# Altium PCB PCB1.PcbDoc (part 2 of 2)
Units mil, origin at the board's own origin, x right, y up, seen from the top; angles counter-clockwise.
Board outline 3975 x 3295 mil, 2 copper layers (Top Layer, Bottom Layer); 85 components, 105 nets, 658 pads, 194 vias.
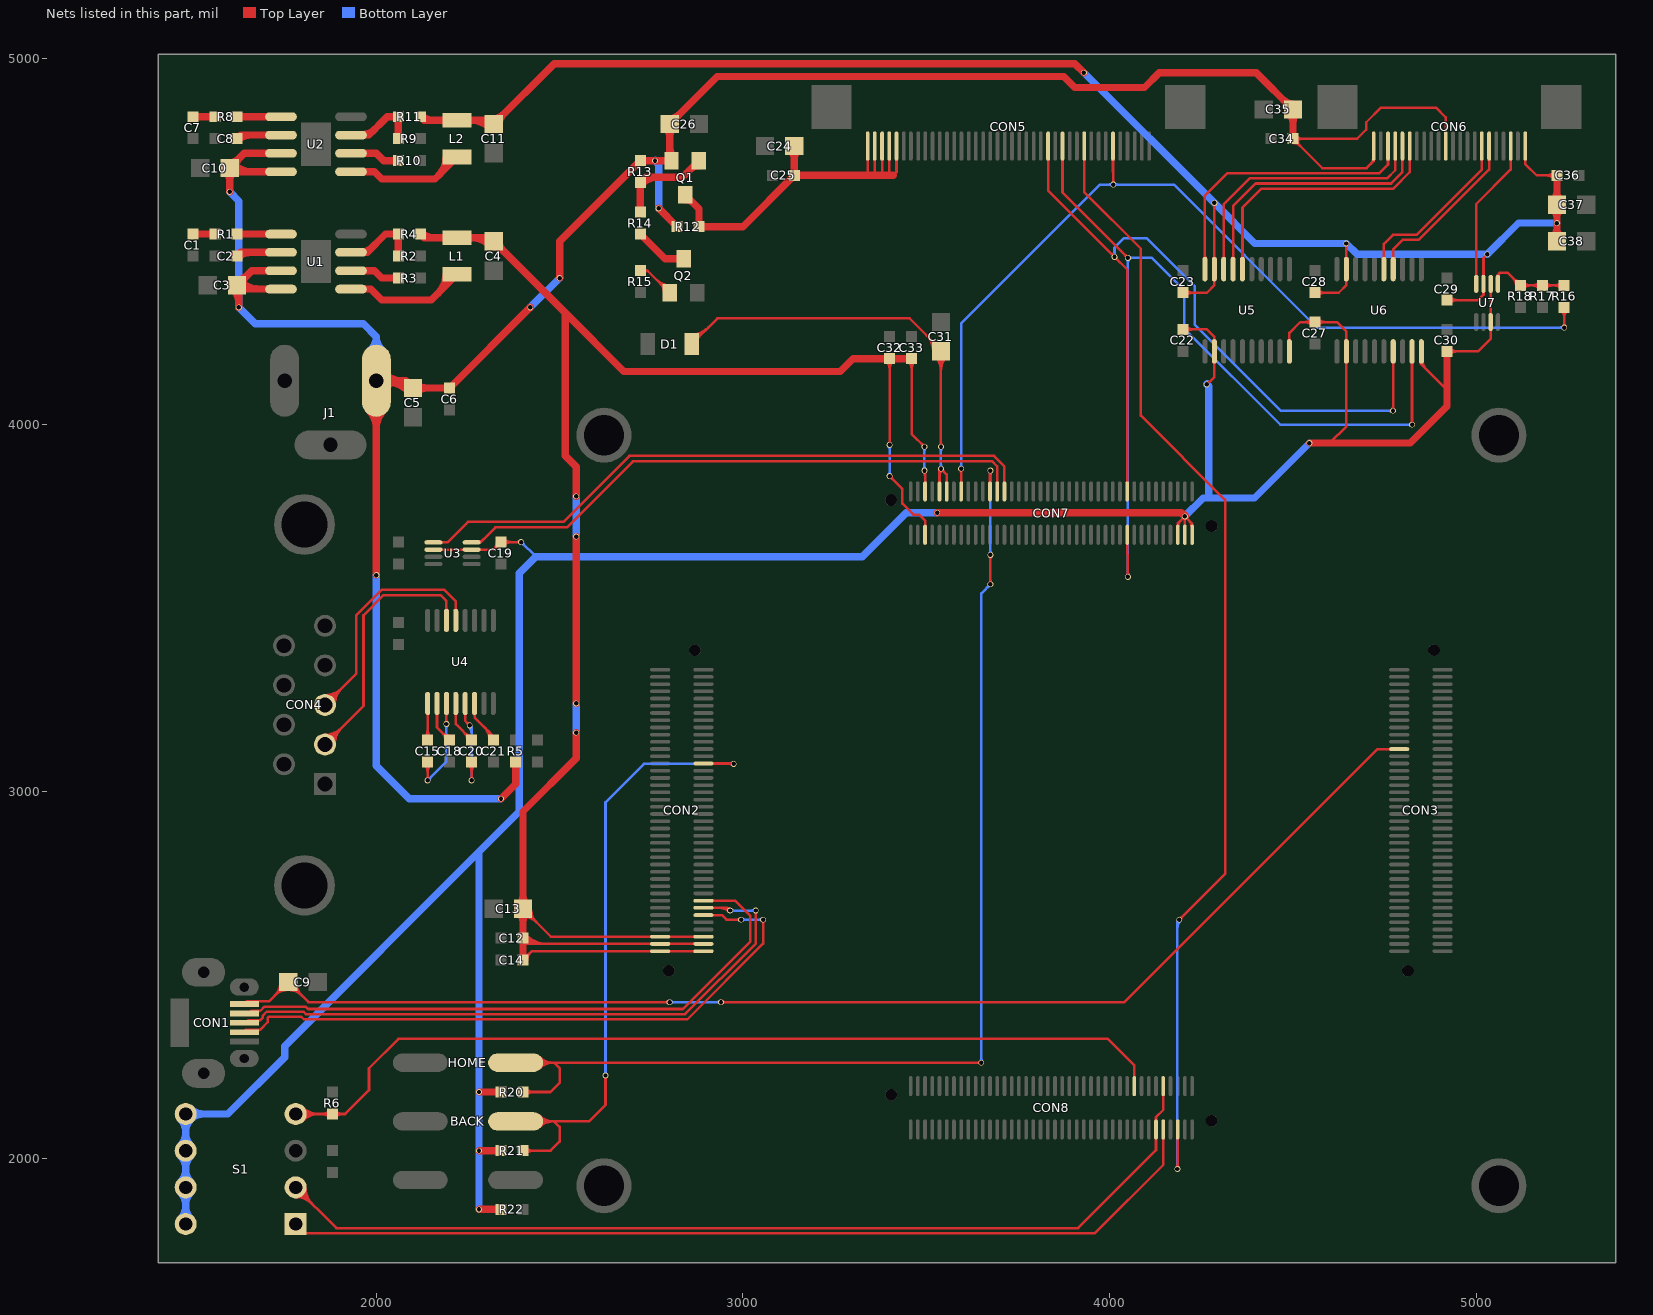
[diagram p2: the nets of this part, all layers, seen from the top]

## Via types
v1: diameter 16, hole 12, Top Layer to Bottom Layer, 194 vias

## Nets (pads, with @x,y where several pads share a name; then routed paths per layer and width w, separated by ;. In a path a pad name is that pad's centre, name@x,y a point inside that pad or via, vN(x,y) a via of type N, cw(c..) or ccw(c..) an arc to the next point about the centre after c; other vN are vias at no path point) (continued)
LCD_VOTCLK: CON5.28 CON7.19 U6.9 | length 2721.9
  Top Layer w7: CON5.28@3871.5,4760 3871.5,4633.5 v1(4050,4455) ; v1@4045.5,4455 ccw(c4034.64,4455) 4042.32,4462.68 ccw(c4050,4470.36) v1@4050,4459.5 ; v1@4046.82,3588.18 ccw(c4039.14,3595.86) 4050,3595.86 ccw(c4060.86,3595.86) v1@4053.18,3588.18 ; CON7.19@4047.83,3700 4047.83,3647.17 4050,3645 v1(4050,3585) ; v1@4821.82,4003.18 ccw(c4814.8,4010.2) 4824.72,4010.2 ; U6.9@4822.33,4171.03 cw(c4816.54,4165.24) 4824.72,4165.24 cw(c4832.91,4165.24) U6.9@4827.12,4171.03 ; 4824.72,4011.53 ccw(c4836.53,4011.53) v1@4828.18,4003.18 ; U6.9@4824.72,4200 4824.72,4000.28 v1(4825,4000)
  Bottom Layer w7: v1@4046.82,3588.18 ccw(c4039.14,3595.86) 4050,3595.86 ccw(c4060.86,3595.86) v1@4053.18,3588.18 ; v1@4046.82,4451.82 cw(c4039.14,4444.14) 4050,4444.14 cw(c4060.86,4444.14) 4053.18,4451.82 cw(c4060.86,4444.14) 4060.86,4455 cw(c4060.86,4465.86) v1@4053.18,4458.18 ; v1(4050,3585) v1(4050,4455) 4115,4455 4204,4366 4204,4261.6 4465.6,4000 v1(4825,4000) ; v1@4821.82,3996.82 ccw(c4814.14,3989.14) 4814.14,4000 ccw(c4814.14,4010.86) v1@4821.82,4003.18
LCD_VSYNC: CON5.26 CON7.20 U6.7 | length 2349.1
  Top Layer w7: CON5.26@3832.13,4760 3832.13,4639.04 v1(4013.27,4457.89) 4048.5,4422.66 4048.5,3818.79 CON7.20@4047.83,3818.12 ; v1@4008.77,4457.89 ccw(c3997.91,4457.89) 4005.59,4465.57 ccw(c4013.27,4473.26) v1@4013.27,4462.39 ; v1@4013.27,4453.39 cw(c4013.27,4442.53) 4020.95,4450.21 cw(c4028.63,4457.89) v1@4017.77,4457.89 ; CON7.20@4046.77,3841.68 ccw(c4042.59,3845.85) 4048.5,3845.85 ; v1@4769.82,4041.18 ccw(c4760.82,4050.18) 4773.54,4050.18 ; U6.7@4771.15,4171.03 cw(c4765.36,4165.24) 4773.54,4165.24 cw(c4781.73,4165.24) U6.7@4775.94,4171.03 ; v1(4773,4038) 4773.54,4038.54 U6.7@4773.54,4200 ; 4773.54,4047.55 ccw(c4782.55,4047.55) v1@4776.18,4041.18
  Bottom Layer w7: v1@4010.09,4461.07 ccw(c4002.41,4468.76) 4013.27,4468.76 ccw(c4024.13,4468.76) v1@4016.45,4461.07 ; v1(4013.27,4457.89) 4013.27,4483.27 4039,4509 4101,4509 4232,4378 4232,4273.2 4467.2,4038 v1(4773,4038) ; v1@4769.82,4034.82 ccw(c4762.14,4027.14) 4762.14,4038 ccw(c4762.14,4048.86) v1@4769.82,4041.18
MD_RSTN: CON5.35 CON7.66 R16.1 | length 2744.5
  Top Layer w7: v1@3591.82,3876.82 cw(c3584.14,3869.14) 3595,3869.14 cw(c3605.86,3869.14) v1@3598.18,3876.82 ; CON7.66@3595,3818.2 v1(3595,3880) ; v1@4006.82,4658.18 ccw(c3999.14,4665.86) 4010,4665.86 ccw(c4020.86,4665.86) v1@4013.18,4658.18 ; CON5.35@4009.29,4760 4009.29,4690 4010,4689.29 v1(4010,4655) ; R16.1@5231.87,4311.87 cw(c5212.24,4292.24) 5240,4292.24 cw(c5267.76,4292.24) R16.1@5248.13,4311.87 ; v1@5236.82,4268.18 ccw(c5229.14,4275.86) 5240,4275.86 ccw(c5250.86,4275.86) v1@5243.18,4268.18 ; v1(5240,4265) R16.1@5240,4320
  Bottom Layer w7: v1@3591.82,3883.18 ccw(c3584.14,3890.86) 3595,3890.86 ccw(c3605.86,3890.86) v1@3598.18,3883.18 ; v1(3595,3880) 3595,4275.71 3974.29,4655 v1(4010,4655) 4175,4655 4565,4265 v1(5240,4265) ; v1@4006.82,4651.82 ccw(c3999.14,4644.14) 3999.14,4655 ccw(c3999.14,4665.86) v1@4006.82,4658.18 ; v1@4013.18,4651.82 cw(c4020.86,4644.14) 4020.86,4655 cw(c4020.86,4665.86) v1@4013.18,4658.18 ; v1@5236.82,4261.82 ccw(c5229.14,4254.14) 5229.14,4265 ccw(c5229.14,4275.86) v1@5236.82,4268.18
NetC1_1: C1.1 R1.1 | length 60
  Top Layer w20: C1.1@1500,4520 R1.1@1560,4520
NetC2_1: C2.1 U1.2 | length 160.4
  Top Layer w20: C2.1@1620,4460 1630,4470 U1.2@1740,4470 ; C2.1@1623.54,4456.46 cw(c1656.21,4423.79) 1656.21,4470
NetC7_1: C7.1 R8.1 | length 60
  Top Layer w20: C7.1@1500,4840 R8.1@1560,4840
NetC8_1: C8.1 U2.2 | length 160.4
  Top Layer w20: C8.1@1620,4780 1630,4790 U2.2@1740,4790 ; C8.1@1623.54,4776.46 cw(c1656.21,4743.79) 1656.21,4790
NetC15_1: C15.1 U4.3 | length 405.9
  Top Layer w7: C15.1@2131.87,3071.87 cw(c2112.24,3052.24) 2140,3052.24 cw(c2167.76,3052.24) C15.1@2148.13,3071.87 ; v1@2136.82,3033.18 ccw(c2129.14,3040.86) 2140,3040.86 ccw(c2150.86,3040.86) v1@2143.18,3033.18 ; v1(2140,3030) C15.1@2140,3080 ; v1@2188,3187 ccw(c2180.32,3194.68) 2191.18,3194.68 ccw(c2202.05,3194.68) v1@2194.36,3187 ; U4.3@2188.78,3213 cw(c2183,3207.21) 2191.18,3207.21 cw(c2199.36,3207.21) U4.3@2193.58,3213 ; v1(2191.18,3183.82) U4.3@2191.18,3240
  Bottom Layer w7: v1(2140,3030) 2191.18,3081.18 v1(2191.18,3183.82) ; v1@2140,3034.5 ccw(c2140,3045.36) 2147.68,3037.68 ccw(c2155.36,3030) v1@2144.5,3030 ; v1@2188,3180.64 cw(c2180.32,3172.95) 2191.18,3172.95 cw(c2202.05,3172.95) v1@2194.36,3180.64
NetC15_2: C15.2 U4.1 | length 156.5
  Top Layer w7: C15.2@2131.87,3148.13 ccw(c2112.24,3167.76) 2140,3167.76 ccw(c2167.76,3167.76) C15.2@2148.13,3148.13 ; U4.1@2137.6,3213 cw(c2131.82,3207.21) 2140,3207.21 cw(c2148.18,3207.21) U4.1@2142.4,3213 ; C15.2@2140,3140 U4.1@2140,3240
NetC18_2: C18.2 U4.2 | length 170.7
  Top Layer w7: U4.2@2163.19,3213 cw(c2157.41,3207.21) 2165.59,3207.21 cw(c2173.77,3207.21) U4.2@2167.99,3213 ; U4.2@2165.59,3240 2165.59,3174.41 C18.2@2200,3140 ; C18.2@2188.5,3140 ccw(c2160.74,3140) 2180.37,3159.63 ccw(c2200,3179.26) C18.2@2200,3151.5
NetC20_1: C20.1 U4.4 | length 174.4
  Top Layer w7: U4.4@2214.37,3213 cw(c2208.59,3207.21) 2216.77,3207.21 cw(c2224.96,3207.21) U4.4@2219.17,3213 ; U4.4@2216.77,3240 2216.77,3183.23 C20.1@2260,3140 ; C20.1@2248.5,3140 ccw(c2220.74,3140) 2240.37,3159.63 ccw(c2260,3179.26) C20.1@2260,3151.5
NetC20_2: C20.2 U4.5 | length 396.9
  Top Layer w7: U4.5@2239.97,3213 cw(c2234.18,3207.21) 2242.36,3207.21 cw(c2250.55,3207.21) U4.5@2244.76,3213 ; U4.5@2242.36,3240 2242.36,3192.64 v1(2255,3180) ; v1@2250.5,3180 ccw(c2239.64,3180) 2247.32,3187.68 ccw(c2255,3195.36) v1@2255,3184.5 ; C20.2@2251.87,3071.87 cw(c2232.24,3052.24) 2260,3052.24 cw(c2287.76,3052.24) C20.2@2268.13,3071.87 ; v1@2256.82,3033.18 ccw(c2249.14,3040.86) 2260,3040.86 ccw(c2270.86,3040.86) v1@2263.18,3033.18 ; v1(2260,3030) C20.2@2260,3080
  Bottom Layer w7: v1@2251.82,3176.82 cw(c2232.07,3157.07) 2260,3157.07 ; v1(2255,3180) 2260,3175 v1(2260,3030) ; v1@2256.82,3033.18 ccw(c2249.14,3040.86) 2260,3040.86 ccw(c2270.86,3040.86) v1@2263.18,3033.18
NetC21_2: C21.2 U4.6 | length 202.7
  Top Layer w7: U4.6@2265.56,3213 cw(c2259.77,3207.21) 2267.95,3207.21 cw(c2276.14,3207.21) U4.6@2270.35,3213 ; U4.6@2267.95,3240 2267.95,3202.05 2320,3150 C21.2@2320,3140 ; 2293.3,3176.7 cw(c2256.59,3140) C21.2@2308.5,3140 ; 2305.25,3164.75 cw(c2280.49,3140) C21.2@2315.5,3140
NetCON4_2: CON4.2 U4.14 | length 938.4
  Top Layer w7: CON4.2@1860,3127.87 1965,3232.87 1965,3480 2020,3535 2175,3535 2191.18,3518.82 U4.14@2191.18,3466.38 ; CON4.2@1860,3140.37 ccw(c1860,3170.55) 1881.34,3149.21 ccw(c1902.68,3127.87) CON4.2@1872.5,3127.87 ; CON4.2@1860,3147.37 ccw(c1860,3194.45) 1893.29,3161.16 ccw(c1926.58,3127.87) CON4.2@1879.5,3127.87 ; CON4.2@1860,3154.37 ccw(c1860,3218.35) 1905.24,3173.11 ccw(c1950.48,3127.87) CON4.2@1886.5,3127.87 ; U4.14@2188.78,3493.38 ccw(c2183,3499.17) 2191.18,3499.17 ccw(c2199.36,3499.17) U4.14@2193.58,3493.38
NetCON4_3: CON4.3 U4.13 | length 879.9
  Top Layer w7: CON4.3@1860,3235.75 1945,3320.75 1945,3480 2015,3550 2185,3550 2216.77,3518.23 U4.13@2216.77,3466.38 ; CON4.3@1860,3248.25 ccw(c1860,3278.43) 1881.34,3257.09 ccw(c1902.68,3235.75) CON4.3@1872.5,3235.75 ; CON4.3@1860,3255.25 ccw(c1860,3302.33) 1893.29,3269.04 ccw(c1926.58,3235.75) CON4.3@1879.5,3235.75 ; CON4.3@1860,3262.25 ccw(c1860,3326.22) 1905.24,3280.99 ccw(c1950.48,3235.75) CON4.3@1886.5,3235.75 ; U4.13@2214.37,3493.38 ccw(c2208.59,3499.17) 2216.77,3499.17 ccw(c2224.96,3499.17) U4.13@2219.17,3493.38
NetL1_1: L1.1 U1.5 | length 387.4
  Top Layer w20: U1.5@1930.94,4370 1985,4370 2015,4340 2150,4340 L1.1@2220,4410 ; 2168.79,4358.79 ccw(c2117.57,4410) L1.1@2190,4410
NetL2_1: L2.1 U2.5 | length 377.3
  Top Layer w20: U2.5@1930.94,4690 1995,4690 2015,4670 2160,4670 L2.1@2220,4730 ; 2170,4680 ccw(c2121.68,4728.32) L2.1@2190,4729.79
NetQ1_1: Q1.1 R13.1 R14.2 | length 340.4
  Top Layer w20: R14.2@2720,4580 R13.1@2720,4660 2735,4675 2835,4675 Q1.1@2880,4720 ; R13.1@2723.54,4656.46 cw(c2768.28,4611.72) 2768.28,4675 ; 2856.75,4696.75 cw(c2880,4673.49) Q1.1@2880,4706.38
NetQ2_1: Q2.1 R15.2 | length 215.4
  Top Layer w7: R15.2@2720,4420 2740,4420 ; R15.2@2729.94,4414.22 cw(c2740,4408.36) 2740,4420 ; R15.2@2729.94,4425.78 ccw(c2740,4431.64) 2740,4420 ; 2765.65,4394.35 ccw(c2800,4428.7) Q2.1@2800,4380.12 ; 2775.15,4384.85 cw(c2754.25,4363.94) Q2.1@2783.82,4363.94 ; 2777.6,4382.4 ccw(c2800,4404.8) Q2.1@2800,4373.12 ; Q2.1@2800,4360 2740,4420
NetQ2_3: Q2.3 R14.1 | length 182.7
  Top Layer w20: R14.1@2720,4520 2787.5,4452.5 Q2.3@2838,4452.5 ; Q2.3@2831.15,4445.65 ccw(c2814.62,4429.12) 2814.62,4452.5 ccw(c2814.62,4475.88) Q2.3@2831.15,4459.35
NetR1_2: R1.2 U1.1 | length 120
  Top Layer w20: R1.2@1620,4520 U1.1@1740,4520
NetR2_1: R2.1 R4.2 U1.7 | length 237
  Top Layer w20: U1.7@1930.94,4470 1975,4470 2025,4520 R4.2@2060,4520 R2.1@2060,4460 ; U1.7@1962.44,4471.81 ccw(c1962.44,4506.5) 1986.97,4481.97
NetR3_1: R3.1 U1.6 | length 137.3
  Top Layer w20: U1.6@1930.94,4420 1995,4420 2015,4400 R3.1@2060,4400
NetR8_2: R8.2 U2.1 | length 120
  Top Layer w20: R8.2@1620,4840 U2.1@1740,4840
NetR9_1: R9.1 R11.2 U2.7 | length 246.5
  Top Layer w20: U2.7@1930.94,4790 1980,4790 2030,4840 R11.2@2060,4840 R9.1@2060,4780 ; U2.7@1962.44,4791.81 ccw(c1962.44,4838.57) 1995.51,4805.51
NetR10_1: R10.1 U2.6 | length 137.3
  Top Layer w20: U2.6@1930.94,4740 2000,4740 2020,4720 R10.1@2060,4720
NetR16_2: R16.2 R17.2 R18.2 U7.5 | length 453.2
  Top Layer w7: U7.5@5059.06,4384.33 5059.06,4409.06 5065,4415 ; U7.5@5061.42,4403.47 cw(c5074.17,4405.83) 5065,4415 ; R18.2@5108.5,4380 ccw(c5080.74,4380) 5100.37,4399.63 ccw(c5120,4419.26) R18.2@5120,4391.5 ; R18.2@5128.13,4371.87 cw(c5147.76,4352.24) 5147.76,4380 cw(c5147.76,4407.76) R18.2@5128.13,4388.13 ; R17.2@5171.87,4371.87 ccw(c5152.24,4352.24) 5152.24,4380 ccw(c5152.24,4407.76) R17.2@5171.87,4388.13 ; R17.2@5188.13,4371.87 cw(c5207.76,4352.24) 5207.76,4380 cw(c5207.76,4407.76) R17.2@5188.13,4388.13 ; R16.2@5231.87,4371.87 ccw(c5212.24,4352.24) 5212.24,4380 ccw(c5212.24,4407.76) R16.2@5231.87,4388.13 ; R16.2@5240,4380 R17.2@5180,4380 R18.2@5120,4380 5085,4415 5065,4415
NRESET: CON6.20 U7.8 | length 414.6
  Top Layer w7: U7.8@5000,4384.33 5000,4601.61 5094.02,4695.62 CON6.20@5094.02,4760
SCLK: CON6.4 U5.18 | length 761.9
  Top Layer w7: U5.18@4308.78,4453.38 ccw(c4303,4459.17) 4311.18,4459.17 ccw(c4319.36,4459.17) U5.18@4313.58,4453.38 ; U5.18@4311.18,4424.41 4311.18,4601.18 4382,4672 4757,4672 4779.06,4694.06 CON6.4@4779.06,4760
SDAT: CON6.6 U5.16 | length 748.1
  Top Layer w7: U5.16@4359.97,4453.38 ccw(c4354.18,4459.17) 4362.36,4459.17 ccw(c4370.55,4459.17) U5.16@4364.76,4453.38 ; U5.16@4362.36,4424.41 4362.36,4592.36 4414,4644 4773.8,4644 4818.43,4688.63 CON6.6@4818.43,4760
SEN: CON6.3 U5.20 | length 798.4
  Top Layer w7: U5.20@4257.6,4453.38 ccw(c4251.82,4459.17) 4260,4459.17 ccw(c4268.18,4459.17) U5.20@4262.4,4453.38 ; U5.20@4260,4424.41 4260,4625 4321,4686 4736,4686 4759.37,4709.37 CON6.3@4759.37,4760
SIM_DET: BACK.1 CON2.54 R21.2 | length 1985.2
  Top Layer w7: BACK.1@2380,2100 2485,2100 ; R21.2@2400,2020 2475,2020 2500,2045 2500,2085 2485,2100 ; R21.2@2408.13,2011.87 cw(c2427.76,1992.24) 2427.76,2020 cw(c2427.76,2047.76) R21.2@2408.13,2028.13 ; BACK.1@2440.25,2089.75 cw(c2465.01,2064.99) 2465.01,2100 cw(c2465.01,2135.01) BACK.1@2440.25,2110.25 ; BACK.1@2445.2,2084.8 cw(c2481.91,2048.09) 2481.91,2100 cw(c2481.91,2151.91) BACK.1@2445.2,2115.2 ; v1@2621.82,2221.82 cw(c2614.14,2214.14) 2625,2214.14 cw(c2635.86,2214.14) v1@2628.18,2221.82 ; v1(2625,2225) 2625,2145 2580,2100 2485,2100 ; CON2.54@2892.33,3075.99 2974.01,3075.99 v1(2975,3075) ; 2961.76,3075.98 cw(c2961.76,3061.76) v1@2971.82,3071.82 ; 2966.51,3075.98 ccw(c2966.51,3083.49) v1@2971.82,3078.18
  Bottom Layer w7: v1@2621.82,2228.18 ccw(c2614.14,2235.86) 2625,2235.86 ccw(c2635.86,2235.86) v1@2628.18,2228.18 ; v1(2625,2225) 2625,2970 2730,3075 v1(2975,3075) ; v1@2971.82,3071.82 ccw(c2964.14,3064.14) 2964.14,3075 ccw(c2964.14,3085.86) v1@2971.82,3078.18
SOUT: CON6.5 U5.17 | length 756.5
  Top Layer w7: U5.17@4334.37,4453.38 ccw(c4328.59,4459.17) 4336.77,4459.17 ccw(c4344.96,4459.17) U5.17@4339.17,4453.38 ; U5.17@4336.77,4424.41 4336.77,4596.77 4398,4658 4768,4658 4798.74,4688.74 CON6.5@4798.74,4760
UART_RING: CON7.58 HOME.1 R20.2 | length 3440.9
  Top Layer w7: HOME.1@2380,2260 2485,2260 ; R20.2@2400,2180 2475,2180 2500,2205 2500,2245 2485,2260 ; R20.2@2408.13,2171.87 cw(c2427.76,2152.24) 2427.76,2180 cw(c2427.76,2207.76) R20.2@2408.13,2188.13 ; HOME.1@2440.25,2249.75 cw(c2465.01,2224.99) 2465.01,2260 cw(c2465.01,2295.01) HOME.1@2440.25,2270.25 ; HOME.1@2445.2,2244.8 cw(c2481.91,2208.09) 2481.91,2260 cw(c2481.91,2311.91) HOME.1@2445.2,2275.2 ; v1@3646.82,2256.82 ccw(c3639.14,2249.14) 3639.14,2260 ccw(c3639.14,2270.86) v1@3646.82,2263.18 ; v1(3650,2260) 2485,2260 ; v1@3671.82,3568.18 ccw(c3664.14,3575.86) 3675,3575.86 ccw(c3685.86,3575.86) v1@3678.18,3568.18 ; v1@3671.82,3641.82 cw(c3664.14,3634.14) 3675,3634.14 cw(c3685.86,3634.14) v1@3678.18,3641.82 ; v1@3671.82,3871.82 cw(c3666.98,3866.98) 3673.82,3866.98 ; CON7.58@3673.82,3818.12 3673.82,3873.82 v1(3675,3875) ; 3673.82,3861.29 cw(c3688.71,3861.29) v1@3678.18,3871.82 ; v1(3675,3565) v1(3675,3645)
  Bottom Layer w7: v1@3646.82,2263.18 ccw(c3639.14,2270.86) 3650,2270.86 ccw(c3660.86,2270.86) v1@3653.18,2263.18 ; v1(3650,2260) 3650,3540 v1(3675,3565) ; v1@3670.5,3565 cw(c3659.64,3565) 3667.32,3557.32 cw(c3675,3549.64) v1@3675,3560.5 ; v1@3671.82,3648.18 ccw(c3664.14,3655.86) 3675,3655.86 ccw(c3685.86,3655.86) v1@3678.18,3648.18 ; v1@3671.82,3871.82 cw(c3664.14,3864.14) 3675,3864.14 cw(c3685.86,3864.14) v1@3678.18,3871.82 ; v1(3675,3645) v1(3675,3875)
V_BKCOIN: C31.1 CON7.70 CON7.72 D1.2 | length 1708.2
  Top Layer w7: D1.2@2860,4220 2930,4290 3454.85,4290 3540,4204.85 C31.1@3540,4200 v1(3540,3940) ; D1.2@2860,4232.5 ccw(c2860,4262.68) 2881.34,4241.34 ; D1.2@2860,4239.5 ccw(c2860,4286.58) 2893.29,4253.29 ; D1.2@2860,4246.5 ccw(c2860,4310.48) 2905.24,4265.24 ; D1.2@2876.5,4230 cw(c2892.19,4230) 2881.1,4241.1 ; 3499.87,4244.98 cw(c3454.89,4200) C31.1@3518.5,4200 ; 3511.58,4233.27 ccw(c3540,4261.7) C31.1@3540,4221.5 ; 3511.82,4233.03 cw(c3478.79,4200) C31.1@3525.5,4200 ; C31.1@3523.53,4221.32 ccw(c3540,4237.8) C31.1@3540,4214.5 ; C31.1@3523.77,4221.08 cw(c3502.69,4200) C31.1@3532.5,4200 ; C31.1@3524.8,4184.8 cw(c3488.09,4148.09) 3540,4148.09 cw(c3591.91,4148.09) C31.1@3555.2,4184.8 ; C31.1@3529.75,4189.75 cw(c3504.99,4164.99) 3540,4164.99 cw(c3575.01,4164.99) C31.1@3550.25,4189.75 ; CON7.72@3536.02,3818.12 3536.02,3876.02 v1(3540,3880) 3555.71,3864.29 CON7.70@3555.71,3818.12 ; 3536.02,3859.54 cw(c3560.46,3859.54) v1@3543.18,3876.82 ; v1@3536.82,3943.18 ccw(c3529.14,3950.86) 3540,3950.86 ccw(c3550.86,3950.86) v1@3543.18,3943.18 ; v1@3540,3875.5 cw(c3540,3864.64) 3547.68,3872.32 cw(c3555.36,3880) v1@3544.5,3880
  Bottom Layer w7: v1@3536.82,3883.18 ccw(c3529.14,3890.86) 3540,3890.86 ccw(c3550.86,3890.86) v1@3543.18,3883.18 ; v1@3536.82,3936.82 cw(c3529.14,3929.14) 3540,3929.14 cw(c3550.86,3929.14) v1@3543.18,3936.82 ; v1(3540,3880) v1(3540,3940)
VALID: CON6.16 U6.15 | length 496.8
  Top Layer w7: U6.15@4745.56,4453.38 ccw(c4739.77,4459.17) 4747.95,4459.17 ccw(c4756.14,4459.17) U6.15@4750.35,4453.38 ; U6.15@4747.95,4424.41 4747.95,4492.95 4773,4518 4837.2,4518 5015.27,4696.08 CON6.16@5015.27,4760
VDD1V8_EXT: C19.2 C22.2 C27.2 C30.2 CON7.1 CON7.3 CON7.5 R20.1 R21.1 R22.1 S1.5 S1.6 S1.7 S1.8 U3.3 U3.6 U5.2 U5.10 U6.2 U6.10 U7.3 U7.6 | length 9315.8
  Top Layer w7: U3.6@2155.67,3659.37 U3.3@2260,3659.37 2319.37,3659.37 C19.2@2340,3680 v1(2395,3680) ; C19.2@2328.5,3680 cw(c2300.74,3680) 2320.37,3660.37 cw(c2340,3640.74) C19.2@2340,3668.5 ; C19.2@2348.13,3671.87 cw(c2367.76,3652.24) 2367.76,3680 cw(c2367.76,3707.76) C19.2@2348.13,3688.13 ; v1@2391.82,3676.82 ccw(c2384.14,3669.14) 2384.14,3680 ccw(c2384.14,3690.86) v1@2391.82,3683.18 ; CON7.5@4185.63,3700 4185.63,3730.32 v1(4205.31,3750) ; CON7.5@4187.13,3722.5 cw(c4209.63,3722.5) 4193.72,3738.41 ; C22.2@4200,4260 4265,4260 4285.59,4239.41 U5.2@4285.59,4200 4285.59,4130.59 v1(4265,4110) ; v1@4200.81,3750 cw(c4189.95,3750) 4197.63,3742.32 cw(c4205.31,3734.64) 4205.31,3745.5 cw(c4205.31,3734.64) 4212.99,3742.32 cw(c4220.68,3750) v1@4209.81,3750 ; v1@4202.13,3746.82 cw(c4194.45,3739.14) 4205.31,3739.14 cw(c4216.18,3739.14) v1@4208.49,3746.82 ; CON7.3@4205.31,3700 v1(4205.31,3750) ; C22.2@4208.13,4251.87 cw(c4227.76,4232.24) 4227.76,4260 cw(c4227.76,4287.76) C22.2@4208.13,4268.13 ; 4216.92,3738.39 cw(c4201.02,3722.5) CON7.1@4223.5,3722.5 ; CON7.1@4225,3700 4225,3730.31 v1(4205.31,3750) ; v1@4265,4114.5 ccw(c4265,4125.36) 4272.68,4117.68 ccw(c4280.36,4110) v1@4269.5,4110 ; U5.2@4283.19,4171.03 cw(c4277.41,4165.24) 4285.59,4165.24 cw(c4293.77,4165.24) U5.2@4287.99,4171.03 ; U5.2@4283.19,4228.97 ccw(c4277.41,4234.76) 4285.59,4234.76 ccw(c4293.77,4234.76) U5.2@4287.99,4228.97 ; U5.10@4487.92,4228.97 ccw(c4482.13,4234.76) 4490.32,4234.76 ccw(c4498.5,4234.76) U5.10@4492.71,4228.97 ; U5.10@4490.31,4200 4490.31,4250.31 4520,4280 C27.2@4560,4280 4620,4280 4645.59,4254.41 U6.2@4645.59,4200 4645.59,3995.59 4600,3950 ; C27.2@4551.87,4271.87 ccw(c4532.24,4252.24) 4532.24,4280 ccw(c4532.24,4307.76) C27.2@4551.87,4288.13 ; C27.2@4568.13,4271.87 cw(c4587.76,4252.24) 4587.76,4280 cw(c4587.76,4307.76) C27.2@4568.13,4288.13 ; U6.2@4643.19,4171.03 cw(c4637.41,4165.24) 4645.59,4165.24 cw(c4653.77,4165.24) U6.2@4647.99,4171.03 ; U6.2@4643.19,4228.97 ccw(c4637.41,4234.76) 4645.59,4234.76 ccw(c4653.77,4234.76) U6.2@4647.99,4228.97 ; U6.10@4846.7,4173.43 ccw(c4859.09,4173.43) 4850.33,4164.67 ; U6.10@4850.31,4200 4850.31,4164.69 4920,4095 ; U6.10@4853.7,4173.43 ccw(c4882.99,4173.43) 4862.28,4152.72 ; C30.2@4920,4200 5005,4200 5039.37,4234.37 U7.3@5039.37,4280 U7.6@5039.37,4384.33 ; C30.2@4928.13,4191.87 cw(c4947.76,4172.24) 4947.76,4200 cw(c4947.76,4227.76) C30.2@4928.13,4208.13 ; 4850.31,4165.24 cw(c4858.5,4165.24) 4852.71,4171.03 ccw(c4858.5,4165.24) 4850.31,4165.24 ; 4850.32,4165.24 ccw(c4842.13,4165.24) 4847.92,4171.03 cw(c4842.13,4165.24) 4850.32,4165.24
  Top Layer w20: v1(2280,1860) R22.1@2340,1860 ; v1(2280,2020) R21.1@2340,2020 ; v1(2280,2180) R20.1@2340,2180 ; v1(3530,3760) 4195.31,3760 v1(4205.31,3750) ; 4186,3760 cw(c4186,3730.69) v1@4206.73,3751.41 ; v1(4545,3950) 4600,3950 4820,3950 4920,4050 4920,4095 C30.2@4920,4200
  Bottom Layer w7: v1@2395,3675.5 cw(c2395,3664.64) 2402.68,3672.32 cw(c2410.36,3680) v1@2399.5,3680 ; v1(2395,3680) 2435,3640
  Bottom Layer w20: S1.8@1465.86,1834.14 ccw(c1431.72,1868.28) 1480,1868.28 ccw(c1528.28,1868.28) S1.8@1494.14,1834.14 ; S1.7@1465.86,1905.86 cw(c1431.72,1871.72) 1480,1871.72 cw(c1528.28,1871.72) S1.7@1494.14,1905.86 ; S1.7@1465.86,1934.14 ccw(c1431.72,1968.28) 1480,1968.28 ccw(c1528.28,1968.28) S1.7@1494.14,1934.14 ; S1.6@1465.86,2005.86 cw(c1431.72,1971.72) 1480,1971.72 cw(c1528.28,1971.72) S1.6@1494.14,2005.86 ; S1.6@1465.86,2034.14 ccw(c1431.72,2068.28) 1480,2068.28 ccw(c1528.28,2068.28) S1.6@1494.14,2034.14 ; S1.5@1465.86,2105.86 cw(c1431.72,2071.72) 1480,2071.72 cw(c1528.28,2071.72) 1494.14,2105.86 cw(c1528.28,2071.72) 1528.28,2120 cw(c1528.28,2168.28) S1.5@1494.14,2134.14 ; S1.8@1480,1820 S1.7@1480,1920 S1.6@1480,2020 S1.5@1480,2120 1595,2120 1750,2275 1750,2305 2280,2835 ; v1(2280,1860) 2280,2835 ; v1(3530,3760) 3445,3760 3325,3640 2435,3640 2390,3595 2390,2945 2280,2835 ; v1(4205.31,3750) 4255.31,3800 4270,3800 4270,4105 v1(4265,4110) ; v1@4266.41,4111.41 cw(c4257.76,4102.76) 4270,4102.76 ; 4275,3800 4395,3800 v1(4545,3950)
VDD25: C11.2 C23.1 C28.1 C29.2 C36.1 C37.1 C38.1 CON6.22 L2.2 R11.1 U5.19 U6.19 U7.7 | length 5156.9
  Top Layer w7: C23.1@4200,4360 4265,4360 4285.59,4380.59 U5.19@4285.59,4424.41 v1(4285.59,4605) ; C23.1@4208.13,4351.87 cw(c4227.76,4332.24) 4227.76,4360 cw(c4227.76,4387.76) C23.1@4208.13,4368.13 ; v1@4282.41,4601.82 cw(c4274.73,4594.14) 4285.59,4594.14 cw(c4296.45,4594.14) v1@4288.77,4601.82 ; U5.19@4283.19,4395.44 cw(c4277.41,4389.65) 4285.59,4389.65 cw(c4293.77,4389.65) U5.19@4287.99,4395.44 ; U5.19@4283.19,4453.38 ccw(c4277.41,4459.17) 4285.59,4459.17 ccw(c4293.77,4459.17) U5.19@4287.99,4453.38 ; C28.1@4560,4360 4625,4360 4645.59,4380.59 U6.19@4645.59,4424.41 v1(4645.59,4494.41) ; C28.1@4568.13,4351.87 cw(c4587.76,4332.24) 4587.76,4360 cw(c4587.76,4387.76) C28.1@4568.13,4368.13 ; v1@4642.41,4491.23 cw(c4634.73,4483.55) 4645.59,4483.55 cw(c4656.45,4483.55) v1@4648.77,4491.23 ; U6.19@4643.19,4395.44 cw(c4637.41,4389.65) 4645.59,4389.65 cw(c4653.77,4389.65) U6.19@4647.99,4395.44 ; U6.19@4643.19,4453.38 ccw(c4637.41,4459.17) 4645.59,4459.17 ccw(c4653.77,4459.17) U6.19@4647.99,4453.38 ; C29.2@4920,4340 5005,4340 5019.69,4354.69 U7.7@5019.69,4384.33 5019.69,4454.69 v1(5030,4465) ; C29.2@4928.13,4331.87 cw(c4947.76,4312.24) 4947.76,4340 cw(c4947.76,4367.76) C29.2@4928.13,4348.13 ; CON6.22@5133.39,4760 5133.39,4711.61 5165,4680 C36.1@5220,4680 ; C36.1@5211.87,4671.87 ccw(c5192.24,4652.24) 5192.24,4680 ccw(c5192.24,4707.76) C36.1@5211.87,4688.13
  Top Layer w20: R11.1@2120,4840 2130,4830 L2.2@2220,4830 2310,4830 C11.2@2320,4820 2485,4985 3905,4985 v1(3930,4960) ; R11.1@2123.54,4843.54 ccw(c2156.21,4876.21) 2156.21,4830 ; L2.2@2192.93,4822.93 ccw(c2175.86,4805.86) 2175.86,4830 ccw(c2175.86,4854.14) L2.2@2192.93,4837.07 ; L2.2@2247.07,4822.93 cw(c2264.14,4805.86) 2264.14,4830 cw(c2264.14,4854.14) L2.2@2247.07,4837.07 ; L2.2@2259.64,4830 cw(c2259.64,4759.64) C11.2@2309.39,4809.39 ; C11.2@2320,4835 ccw(c2320,4871.21) 2345.61,4845.61 ccw(c2371.21,4820) C11.2@2335,4820 ; C38.1@5209.39,4510.61 ccw(c5183.79,4536.21) 5220,4536.21 ccw(c5256.21,4536.21) C38.1@5230.61,4510.61 ; C37.1@5209.39,4589.39 cw(c5183.79,4563.79) 5220,4563.79 cw(c5256.21,4563.79) C37.1@5230.61,4589.39 ; C37.1@5209.39,4610.61 ccw(c5183.79,4636.21) 5220,4636.21 ccw(c5256.21,4636.21) C37.1@5230.61,4610.61 ; C38.1@5220,4500 C37.1@5220,4600 C36.1@5220,4680
  Bottom Layer w20: v1@3930.3,4960.3 v1(4285.59,4605) 4396.18,4494.41 v1(4645.59,4494.41) 4675,4465 v1(5030,4465) 5115,4550 v1(5220,4550)
VSYNC: CON6.17 U6.14 | length 482.5
  Top Layer w7: U6.14@4771.15,4453.38 ccw(c4765.36,4459.17) 4773.54,4459.17 ccw(c4781.73,4459.17) U6.14@4775.94,4453.38 ; U6.14@4773.54,4424.41 4773.54,4478.54 4799,4504 4842.99,4504 5034.96,4695.97 CON6.17@5034.96,4760
VSYS: C3.2 C5.2 C6.1 C10.2 C26.2 C34.2 C35.2 CON6.1 CON6.11 J1.1 Q1.2 R5.1 R12.1 R13.2 U1.3 U1.4 U2.3 U2.4 | length 8500.3
  Top Layer w7: C34.2@4500,4768.5 cw(c4500,4740.74) 4519.63,4760.37 cw(c4539.26,4780) C34.2@4511.5,4780 ; C34.2@4508.13,4771.87 cw(c4527.76,4752.24) 4527.76,4780 cw(c4527.76,4807.76) C34.2@4508.13,4788.13 ; 4713.2,4712.2 ccw(c4700.39,4725) CON6.1@4718.5,4725 ; CON6.1@4720,4760 4720,4719 4701,4700 4580,4700 C34.2@4500,4780 4675,4780 4700,4805 4700,4825 4740,4865 4890,4865 4916.85,4838.15 CON6.11@4916.85,4760
  Top Layer w20: C10.2@1589.39,4689.39 cw(c1563.79,4663.79) 1600,4663.79 cw(c1636.21,4663.79) C10.2@1610.61,4689.39 ; v1(1600,4635) C10.2@1600,4700 ; C10.2@1600,4715 ccw(c1600,4751.21) 1625.61,4725.61 ccw(c1651.21,4700) C10.2@1615,4700 ; C3.2@1609.39,4369.39 cw(c1571.72,4331.72) 1625,4331.72 ; C10.2@1610.61,4710.61 ccw(c1660.36,4760.36) 1660.36,4690 ; C3.2@1620,4395 ccw(c1620,4431.21) 1645.61,4405.61 ccw(c1671.21,4380) C3.2@1635,4380 ; v1(1625,4320) C3.2@1625,4375 ; C3.2@1630.61,4390.61 ccw(c1680.36,4440.36) 1680.36,4370 ; U1.4@1740,4370 1630,4370 C3.2@1625,4375 ; U1.3@1740,4420 1660,4420 C3.2@1620,4380 C3.2@1625,4375 ; U2.4@1740,4690 1610,4690 C10.2@1600,4700 ; U2.3@1740,4740 1640,4740 C10.2@1600,4700 ; J1.1@1979.23,4040.18 cw(c1929.09,3990.04) 2000,3990.04 cw(c2070.91,3990.04) J1.1@2020.77,4040.18 ; v1(2000,3590) J1.1@2000,4120 2080,4120 C5.2@2100,4100 C6.1@2200,4100 v1(2420,4320) ; J1.1@2015.5,4120 cw(c2015.5,4015.5) C5.2@2089.39,4089.39 ; J1.1@2020.77,4099.23 cw(c2070.91,4049.09) 2070.91,4120 cw(c2070.91,4190.91) J1.1@2020.77,4140.77 ; 2063.79,4120 cw(c2063.79,4063.79) C5.2@2103.54,4103.54 ; C5.2@2110.61,4089.39 cw(c2136.21,4063.79) 2136.21,4100 cw(c2136.21,4136.21) C5.2@2110.61,4110.61 ; v1(2340,2980) 2380,3020 R5.1@2380,3080 ; v1(2500,4400) 2500,4500 R13.2@2720,4720 v1(2760,4720) 2795,4720 2800,4725 C26.2@2800,4820 2930,4950 3875,4950 3905,4920 4095,4920 4135,4960 4400,4960 C35.2@4500,4860 C34.2@4500,4780 ; v1(2770,4590) R12.1@2820,4540 ; C26.2@2789.39,4809.39 cw(c2763.79,4783.79) 2800,4783.79 cw(c2836.21,4783.79) C26.2@2810.61,4809.39 ; Q1.2@2798.15,4713.15 ccw(c2781.62,4696.62) 2781.62,4720 ccw(c2781.62,4743.38) Q1.2@2798.15,4726.85 ; 2800,4759.39 ccw(c2840.45,4759.39) Q1.2@2811.85,4730.79 ; C26.2@2800,4835 ccw(c2800,4871.21) 2825.61,4845.61 ccw(c2851.21,4820) C26.2@2815,4820 ; C35.2@4485,4860 ccw(c4448.79,4860) 4474.39,4885.61 ccw(c4500,4911.21) C35.2@4500,4875 ; C35.2@4489.39,4849.39 cw(c4463.79,4823.79) 4500,4823.79 cw(c4536.21,4823.79) C35.2@4510.61,4849.39
  Bottom Layer w20: v1(1600,4635) 1625,4610 v1(1625,4320) 1670,4275 1965,4275 2000,4240 ; J1.1@1981.7,4202.03 ccw(c1951.46,4240) 2000,4240 ; v1(2000,3590) 2000,3070 2090,2980 v1(2340,2980) ; J1.1@2000,4120 2000,4240 ; J1.1@2018.3,4202.03 cw(c2048.54,4240) 2000,4240 ; v1(2420,4320) v1(2500,4400) ; v1(2760,4720) 2770,4710 v1(2770,4590) ; v1@2761.41,4721.41 cw(c2740.69,4700.69) 2770,4700.69
VSYS_K: C4.2 C12.1 C13.2 C14.1 C32.1 C33.1 CON2.1 CON2.2 CON2.3 CON2.4 CON2.5 CON2.6 CON7.75 CON7.76 L1.2 R4.1 | length 6714.4
  Top Layer w7: C12.1@2393.28,2593.28 ccw(c2416.01,2616.01) 2416.01,2583.87 ; C12.1@2398.23,2598.23 ccw(c2432.91,2632.91) 2432.91,2583.87 ; C14.1@2400,2540 2424.18,2564.18 CON2.1@2774.21,2564.18 2835,2564.18 CON2.2@2892.33,2564.18 ; C14.1@2400,2551.5 ccw(c2400,2579.26) 2419.63,2559.63 ccw(c2439.26,2540) C14.1@2411.5,2540 ; C12.1@2400,2600 2416.13,2583.87 ; C13.2@2400,2658.5 cw(c2400,2606.59) 2436.7,2643.3 cw(c2473.41,2680) C13.2@2421.5,2680 ; C13.2@2400,2665.5 cw(c2400,2630.49) 2424.75,2655.25 cw(c2449.51,2680) C13.2@2414.5,2680 ; C13.2@2400,2680 2476.45,2603.55 CON2.5@2774.21,2603.55 2835,2603.55 CON2.6@2892.33,2603.55 ; C12.1@2401.7,2588.63 cw(c2404.2,2571.93) 2416.13,2583.87 ; C12.1@2403.18,2603.18 ccw(c2449.81,2649.81) 2449.81,2583.87 ; C12.1@2408.13,2608.13 ccw(c2466.71,2666.71) 2466.71,2583.87 ; C12.1@2411.37,2598.3 ccw(c2428.07,2595.8) 2416.13,2583.87 ; CON2.4@2892.33,2583.87 2835,2583.87 CON2.3@2774.21,2583.87 2416.13,2583.87 ; C32.1@3391.87,4171.87 cw(c3372.24,4152.24) 3400,4152.24 cw(c3427.76,4152.24) C32.1@3408.13,4171.87 ; v1@3396.82,3948.18 ccw(c3389.14,3955.86) 3400,3955.86 ccw(c3410.86,3955.86) v1@3403.18,3948.18 ; v1@3400,3855.5 cw(c3400,3844.64) 3407.68,3852.32 cw(c3415.36,3860) v1@3404.5,3860 ; v1(3400,3860) 3435,3825 3435,3785 3465,3755 3480,3755 3496.65,3738.35 CON7.75@3496.65,3700 ; v1(3400,3945) C32.1@3400,4180 ; C33.1@3451.87,4171.87 cw(c3432.24,4152.24) 3460,4152.24 cw(c3487.76,4152.24) C33.1@3468.13,4171.87 ; C33.1@3460,4180 3460,3975 v1(3495,3940) ; v1@3490.5,3940 ccw(c3479.64,3940) 3487.32,3947.68 ccw(c3495,3955.36) v1@3495,3944.5 ; v1@3491.82,3871.82 cw(c3480.14,3860.14) 3496.65,3860.14 ; v1(3495,3875) 3496.65,3873.35 CON7.76@3496.65,3818.12
  Top Layer w20: R4.1@2120,4520 2130,4510 L1.2@2220,4510 C4.2@2310,4510 ; R4.1@2123.54,4523.54 ccw(c2156.21,4556.21) 2156.21,4510 ; L1.2@2192.93,4502.93 ccw(c2175.86,4485.86) 2175.86,4510 ccw(c2175.86,4534.14) L1.2@2192.93,4517.07 ; L1.2@2247.07,4502.93 cw(c2264.14,4485.86) 2264.14,4510 cw(c2264.14,4534.14) L1.2@2247.07,4517.07 ; L1.2@2259.64,4510 cw(c2259.64,4439.64) C4.2@2309.39,4489.39 ; C4.2@2320,4485 cw(c2320,4448.79) 2345.61,4474.39 cw(c2371.21,4500) C4.2@2335,4500 ; C4.2@2320,4500 2515,4305 ; C13.2@2389.39,2669.39 cw(c2363.79,2643.79) 2400,2643.79 cw(c2436.21,2643.79) C13.2@2410.61,2669.39 ; C13.2@2389.39,2690.61 ccw(c2363.79,2716.21) 2400,2716.21 ccw(c2436.21,2716.21) C13.2@2410.61,2690.61 ; C14.1@2400,2540 C12.1@2400,2600 C13.2@2400,2680 2400,2945 2545,3090 v1(2545,3160) ; v1(2545,3240) v1(2545,3695) ; v1(2545,3805) 2545,3885 2515,3915 2515,4305 ; C33.1@3460,4180 C32.1@3400,4180 3300,4180 3265,4145 2675,4145 2515,4305
  Bottom Layer w7: v1@3396.82,3863.18 ccw(c3389.14,3870.86) 3400,3870.86 ccw(c3410.86,3870.86) v1@3403.18,3863.18 ; v1@3396.82,3941.82 cw(c3389.14,3934.14) 3400,3934.14 cw(c3410.86,3934.14) v1@3403.18,3941.82 ; v1(3400,3860) v1(3400,3945) ; v1@3491.82,3878.18 ccw(c3484.14,3885.86) 3495,3885.86 ccw(c3505.86,3885.86) v1@3498.18,3878.18 ; v1@3491.82,3936.82 cw(c3484.14,3929.14) 3495,3929.14 cw(c3505.86,3929.14) v1@3498.18,3936.82 ; v1(3495,3875) v1(3495,3940)
  Bottom Layer w20: v1(2545,3160) v1(2545,3240) ; v1(2545,3695) v1(2545,3805)
VSYS_LCD: C24.1 C25.2 CON5.1 CON5.2 CON5.3 CON5.4 CON5.5 Q1.3 R12.2 | length 1273.3
  Top Layer w7: 3330,4680 3340,4690 CON5.1@3340,4760 ; 3350,4680 3359.68,4689.69 CON5.2@3359.68,4760 ; 3370,4680 3379.37,4689.37 CON5.3@3379.37,4760 ; 3390,4680 3399.05,4689.06 CON5.4@3399.05,4760 ; 3410,4680 3418.74,4688.74 CON5.5@3418.74,4760
  Top Layer w20: Q1.3@2842,4613.88 cw(c2842,4580.99) 2865.25,4604.25 ; Q1.3@2842,4627.5 2880,4589.5 R12.2@2880,4540 3000,4540 C25.2@3140,4680 ; C24.1@3129.39,4749.39 cw(c3103.79,4723.79) 3140,4723.79 cw(c3176.21,4723.79) C24.1@3150.61,4749.39 ; C24.1@3140,4760 C25.2@3140,4680 ; 3410,4680 3390,4680 3370,4680 3350,4680 3330,4680 C25.2@3140,4680
XEINT6: CON8.18 R6.1 S1.4 | length 2793
  Top Layer w7: S1.4@1780,2120 R6.1@1870,2120 ; S1.4@1788.84,2111.16 cw(c1810.18,2089.82) 1810.18,2120 cw(c1810.18,2150.18) S1.4@1788.84,2128.84 ; S1.4@1793.79,2106.21 cw(c1827.08,2072.92) 1827.08,2120 cw(c1827.08,2167.08) S1.4@1793.79,2133.79 ; S1.4@1798.74,2101.26 cw(c1843.98,2056.02) 1843.98,2120 cw(c1843.98,2183.98) S1.4@1798.74,2138.74 ; R6.1@1871.87,2111.87 ccw(c1852.24,2092.24) 1852.24,2120 ccw(c1852.24,2147.76) R6.1@1871.87,2128.13 ; R6.1@1880,2120 1915,2120 1980,2185 1980,2244.8 2060.2,2325 3995,2325 4067.52,2252.48 CON8.18@4067.52,2196.07 ; R6.1@1888.13,2111.87 cw(c1907.76,2092.24) 1907.76,2120 cw(c1907.76,2147.76) R6.1@1888.13,2128.13
XOM2: CON8.9 S1.1 | length 2550.5
  Top Layer w7: S1.1@1780,1820 1805,1795 3960,1795 4146.26,1981.26 CON8.9@4146.26,2077.95
XOM3: CON8.10 CON8.11 S1.2 | length 2885.1
  Top Layer w7: S1.2@1780,1893.5 cw(c1780,1829.52) 1825.24,1874.76 cw(c1870.48,1920) S1.2@1806.5,1920 ; S1.2@1780,1900.5 cw(c1780,1853.42) 1813.29,1886.71 cw(c1846.58,1920) S1.2@1799.5,1920 ; S1.2@1780,1907.5 cw(c1780,1877.32) 1801.34,1898.66 cw(c1822.68,1920) S1.2@1792.5,1920 ; S1.2@1780,1920 1891,1809 3914,1809 4126.57,2021.57 CON8.11@4126.57,2077.95 4126.57,2111.57 4146.26,2131.26 CON8.10@4146.26,2196.07
XPWMTOUT1: CON5.31 CON8.5 | length 3184.4
  Top Layer w7: CON5.31@3930.55,4760 3930.55,4634.45 4085,4480 4085,4025 4315,3795 4315,2775 v1(4190,2650) ; v1@4181.82,1973.18 ccw(c4172.62,1982.38) 4185.63,1982.38 ; v1(4185,1970) 4185.63,1970.63 CON8.5@4185.63,2077.95 ; 4185.63,1979.34 ccw(c4194.34,1979.34) v1@4188.18,1973.18 ; v1@4190,2654.5 ccw(c4190,2665.36) 4197.68,2657.68 ccw(c4205.36,2650) v1@4194.5,2650
  Bottom Layer w7: v1@4181.82,1973.18 ccw(c4174.14,1980.86) 4185,1980.86 ccw(c4195.86,1980.86) v1@4188.18,1973.18 ; v1(4185,1970) 4185,2645 v1(4190,2650) ; 4185,2627.07 cw(c4212.94,2627.07) v1@4193.18,2646.82
XUOTGDM: CON1.2 CON2.16 | length 1725.6
  Top Layer w7: CON1.2@1640,2394.41 1651.58,2394.41 1658.8,2401.63 1683.72,2401.63 ; CON1.2@1654.89,2395.29 cw(c1661.57,2394.94) CON1.2@1661.57,2401.63 ; CON1.2@1661.88,2394.92 cw(c1668.95,2394.55) CON1.2@1668.95,2401.63 ; CON1.2@1668.87,2394.55 cw(c1676.34,2394.15) CON1.2@1676.34,2401.63 ; CON1.2@1675.86,2394.18 cw(c1683.72,2393.76) 1683.72,2401.63 ; CON2.16@2892.33,2701.98 2978.02,2701.98 3020,2660 3020,2590 2836.5,2406.5 1813.7,2406.5 1807.2,2413 1695.09,2413 1683.72,2401.63
XUOTGDP: CON1.3 CON2.14 | length 1876.8
  Top Layer w7: CON1.3@1640,2368.82 1645.79,2368.82 1653.01,2376.04 1683.72,2376.04 ; CON1.3@1647.9,2370.07 cw(c1654.19,2369.74) CON1.3@1654.19,2376.04 ; CON1.3@1654.89,2369.7 cw(c1661.57,2369.35) CON1.3@1661.57,2376.04 ; CON1.3@1661.88,2369.33 cw(c1668.96,2368.95) CON1.3@1668.96,2376.04 ; CON1.3@1668.87,2368.96 cw(c1676.34,2368.56) CON1.3@1676.34,2376.04 ; CON1.3@1675.86,2368.59 cw(c1683.72,2368.17) 1683.72,2376.04 ; CON2.14@2892.33,2682.29 2957.71,2682.29 v1(2965,2675) ; 2936.54,2682.29 cw(c2936.54,2646.54) v1@2961.82,2671.82 ; 2953.44,2682.29 cw(c2953.44,2663.44) v1@2966.77,2676.77 ; v1@3031.82,2671.82 cw(c3024.14,2664.14) 3035,2664.14 cw(c3045.86,2664.14) v1@3038.18,2671.82 ; v1(3035,2675) 3035,2585 2842.5,2392.5 1807.9,2392.5 1801.4,2399 1700.89,2399 1689.87,2387.98 1689.87,2382.19 1683.72,2376.04
  Bottom Layer w7: v1(2965,2675) v1(3035,2675) ; v1@2968.18,2671.82 cw(c2975.86,2664.14) 2975.86,2675 cw(c2975.86,2685.86) v1@2968.18,2678.18 ; v1@3031.82,2671.82 ccw(c3024.14,2664.14) 3024.14,2675 ccw(c3024.14,2685.86) v1@3031.82,2678.18
XUOTGID: CON1.4 CON2.12 | length 1891.2
  Top Layer w7: CON1.4@1640,2343.23 1647.22,2350.45 1683.72,2350.45 ; CON1.4@1640.91,2344.85 cw(c1646.81,2344.54) CON1.4@1646.81,2350.45 ; CON1.4@1647.9,2344.48 cw(c1654.19,2344.15) CON1.4@1654.19,2350.44 ; CON1.4@1654.89,2344.11 cw(c1661.57,2343.75) CON1.4@1661.57,2350.44 ; CON1.4@1661.88,2343.74 cw(c1668.96,2343.36) CON1.4@1668.96,2350.45 ; CON1.4@1668.87,2343.37 cw(c1676.34,2342.97) CON1.4@1676.34,2350.44 ; CON1.4@1675.86,2343 cw(c1683.72,2342.58) 1683.72,2350.45 ; CON2.12@2892.33,2662.61 2942.39,2662.61 2955,2650 v1(2995,2650) ; v1@2991.82,2646.82 ccw(c2984.14,2639.14) 2984.14,2650 ccw(c2984.14,2660.86) v1@2991.82,2653.18 ; v1@3051.82,2646.82 cw(c3044.14,2639.14) 3055,2639.14 cw(c3065.86,2639.14) v1@3058.18,2646.82 ; v1(3055,2650) 3055,2585 2848.5,2378.5 1802.1,2378.5 1795.6,2385 1706.69,2385 1703.87,2382.18 1703.87,2370.6 1683.72,2350.45
  Bottom Layer w7: v1(2995,2650) v1(3055,2650) ; v1@2998.18,2646.82 cw(c3005.86,2639.14) 3005.86,2650 cw(c3005.86,2660.86) v1@2998.18,2653.18 ; v1@3051.82,2646.82 ccw(c3044.14,2639.14) 3044.14,2650 ccw(c3044.14,2660.86) v1@3051.82,2653.18
XUOTGVBUS: C9.2 CON1.1 CON3.24 | length 3824.8
  Top Layer w7: CON1.1@1640,2420 1647,2427 1707,2427 C9.2@1760,2480 1815,2425 v1(2800,2425) ; C9.2@1738.5,2480 cw(c1686.59,2480) 1723.3,2443.3 cw(c1760,2406.59) 1760,2458.5 cw(c1760,2406.59) 1796.7,2443.3 cw(c1833.41,2480) C9.2@1781.5,2480 ; C9.2@1745.5,2480 cw(c1710.49,2480) 1735.25,2455.25 cw(c1760,2430.49) 1760,2465.5 cw(c1760,2430.49) 1784.75,2455.25 cw(c1809.51,2480) C9.2@1774.5,2480 ; v1@2796.82,2421.82 ccw(c2789.14,2414.14) 2789.14,2425 ccw(c2789.14,2435.86) v1@2796.82,2428.18 ; v1(2940,2425) 4040,2425 4730.35,3115.36 CON3.24@4789.96,3115.36 ; v1@2943.18,2421.82 cw(c2950.86,2414.14) 2950.86,2425 cw(c2950.86,2435.86) v1@2943.18,2428.18
  Bottom Layer w7: v1(2800,2425) v1(2940,2425) ; v1@2803.18,2421.82 cw(c2810.86,2414.14) 2810.86,2425 cw(c2810.86,2435.86) v1@2803.18,2428.18 ; v1@2936.82,2421.82 ccw(c2929.14,2414.14) 2929.14,2425 ccw(c2929.14,2435.86) v1@2936.82,2428.18
XURXD2: CON7.54 U3.5 | length 1735.5
  Top Layer w7: U3.5@2155.67,3679.06 2194.06,3679.06 2250,3735 2510,3735 2690,3915 3684.8,3915 3713.19,3886.61 CON7.54@3713.19,3818.12
XUTXD2: CON7.56 U3.4 | length 1613.7
  Top Layer w7: U3.4@2260,3679.06 2284.06,3679.06 2325,3720 2520,3720 2700,3900 3680,3900 3693.5,3886.5 CON7.56@3693.5,3818.12 ; U3.4@2278.7,3681.46 ccw(c2278.7,3700.19) 2291.95,3686.95
pads on no net: "CON2. " "CON3. " "CON7. " "CON8. " CON2.9 CON2.10 CON2.11 CON2.13 CON2.17 CON2.19 CON2.20 CON2.22 CON2.23 CON2.25 CON2.26 CON2.27 CON2.28 CON2.30 CON2.31 CON2.32 CON2.33 CON2.34 CON2.35 CON2.36 CON2.37 CON2.38 CON2.40 CON2.41 CON2.42 CON2.43 CON2.44 CON2.45 CON2.46 CON2.47 CON2.48 CON2.49 CON2.50 CON2.51 CON2.52 CON2.53 CON2.56 CON2.57 CON2.58 CON2.59 CON2.60 CON2.61 CON2.62 CON2.63 CON2.64 CON2.66 CON2.68 CON2.69 CON2.70 CON2.71 CON2.72 CON2.73 CON2.74 CON2.75 CON2.76 CON2.77 CON2.78 CON3.1 CON3.2 CON3.3 CON3.4 CON3.5 CON3.7 CON3.8 CON3.9 CON3.10 CON3.13 CON3.14 CON3.15 CON3.16 CON3.19 CON3.20 CON3.21 CON3.22 CON3.23 CON3.27 CON3.28 CON3.29 CON3.30 CON3.31 CON3.32 CON3.33 CON3.34 CON3.35 CON3.36 CON3.39 CON3.40 CON3.42 CON3.44 CON3.46 CON3.48 CON3.49 CON3.50 CON3.51 CON3.53 CON3.54 CON3.55 CON3.56 CON3.58 CON3.59 CON3.61 CON3.62 CON3.64 CON3.65 CON3.67 CON3.68 CON3.70 CON3.71 CON3.72 CON3.73 CON3.74 CON3.75 CON3.76 CON3.77 CON3.79 CON3.80 CON4.1 CON4.4 CON4.6 CON4.7 CON4.8 CON4.9 CON4.10 CON4.11 CON7.2 CON7.4 CON7.6 CON7.7 CON7.8 CON7.9 CON7.10 CON7.11 CON7.12 CON7.13 CON7.46 CON7.48 CON7.49 CON7.50 CON7.51 CON7.53 CON7.55 CON7.57 CON7.59 CON7.60 CON7.61 CON7.62 CON7.63 CON7.64 CON7.65 CON7.68 CON7.69 CON7.71 CON7.73 CON8.8 CON8.12 CON8.13 CON8.14 CON8.15 CON8.16 CON8.17 CON8.19 CON8.20 CON8.21 CON8.22 CON8.24 CON8.26 CON8.27 CON8.28 CON8.29 CON8.30 CON8.31 CON8.32 CON8.33 CON8.34 CON8.35 CON8.36 CON8.37 CON8.38 CON8.39 CON8.40 CON8.41 CON8.42 CON8.43 CON8.44 CON8.45 CON8.46 CON8.47 CON8.48 CON8.49 CON8.50 CON8.51 CON8.52 CON8.54 CON8.55 CON8.56 CON8.57 CON8.58 CON8.59 CON8.60 CON8.61 CON8.62 CON8.64 CON8.65 CON8.67 CON8.68 CON8.69 CON8.70 CON8.71 CON8.72 CON8.73 CON8.74 U1.8 U2.8 U4.7 U4.8 U4.9 U4.10 U7.1 U7.4

## Polygon pours and split planes (outlines as drawn)
no net on Top Overlay (solid): 5042.3,3710.89 ccw(c4952.85,3710.89) 4952.85,3800.33 ccw(c4952.85,3710.89) 4863.41,3710.89 ccw(c4952.85,3710.89) 4952.85,3621.44 ccw(c4952.85,3710.89) 5042.3,3710.89
GND on Top Layer "POWER-No Net" (solid, remove dead copper): 1320,5160 1275,5115 1275,1615 5450,1615 5490,1575 5505,1590 5505,5220
GND on Bottom Layer "POWER-No Net" (solid, remove dead copper): 1300,5130 1300,1620 1325,1595 5560,1595 5560,5040 5500,5100

## Keep-outs
Keep-Out Layer:
  lines w7: 1405,1715 5380,1715 5380,5010 1405,5010 1405,4920 1405,4510 1405,1715

## Silkscreen, mask and mechanical layers (free items; w line width, h text height)
Top Overlay:
  pour cut-out: 4982.85,3665.57 4982.85,3695.57 4887.85,3695.57 4887.85,3725.57 4982.85,3725.57 4982.85,3755.57 5027.85,3710.57 4982.85,3665.57
  lines w6: 2463.48,1825 2463.48,1766.71 2860.78,1766.71 4825.68,1766.71 5219.38,1766.71 5219.38,2160.41 5219.38,3735.21 5219.38,4128.91 4950,4128.91 ; 2463.48,3735.21 2463.48,4128.91 2857.18,4128.91
  lines w7: 2463.48,2243.48 2463.48,3735.21 ; 2857.18,4128.91 4153.91,4128.91